# EAGLE board CT_schematic (EAGLE 7.6.0)

Size 100 x 80 mm. Coordinates in mm from the lower left corner, seen from the top.
Outline: 0,0 100,0 100,80 0,80 0,0
Copper layers (1*16): Top 0.035mm / dielectric 1.5mm / Bottom 0.035mm
Design rules "default": minimum track width 10mil, minimum drill 24mil, track to track 8mil, track to pad 8mil, pad to pad 8mil, via to via 8mil, smd to smd 8mil, copper to edge 40mil, drill to drill 8mil, minimum pad ring 10mil, minimum via ring 8mil, stop-mask expansion 4mil, vias tented up to drill 0mil, thermal gap 10mil

## Footprints (pad centres in the part's own frame; a part is rotated, then mirrored left to right if it is on the bottom)
C0603 = smd 0.8 x 0.8: 1 -0.762,0; 2 0.762,0
C0402 = smd 0.5 x 0.5: 1 -0.508,0; 2 0.508,0
C0805 = smd 1.2 x 1.3: 1 -1.016,0; 2 1.016,0
EXV-9H = smd 3.505 x 1.676: 1 -2.857,0; 2 2.857,0
L0603 = smd 0.8 x 0.8: 1 -0.762,0; 2 0.762,0
DR1040 = smd 1.6 x 3.2: 1 -4.458,0; 2 4.458,0
PJ-037B_PACKAGE = drill 3.7 square: 1 12,0 | drill 3.2 square: 2 6,0
R0603 = smd 0.8 x 0.8: 1 -0.762,0; 2 0.762,0
LQFP64 = smd 0.3 x 1.2: 1 -3.75,-5.75; 2 -3.25,-5.75; 3 -2.75,-5.75; 4 -2.25,-5.75; 5 -1.75,-5.75; 6 -1.25,-5.75; 7 -0.75,-5.75; 8 -0.25,-5.75; 9 0.25,-5.75; 10 0.75,-5.75; 11 1.25,-5.75; 12 1.75,-5.75; 13 2.25,-5.75; 14 2.75,-5.75; 15 3.25,-5.75; 16 3.75,-5.75; 33 3.75,5.75; 34 3.25,5.75; 35 2.75,5.75; 36 2.25,5.75; 37 1.75,5.75; 38 1.25,5.75; 39 0.75,5.75; 40 0.25,5.75; 41 -0.25,5.75; 42 -0.75,5.75; 43 -1.25,5.75; 44 -1.75,5.75; 45 -2.25,5.75; 46 -2.75,5.75; 47 -3.25,5.75; 48 -3.75,5.75 | smd 1.2 x 0.3: 17 5.75,-3.75; 18 5.75,-3.25; 19 5.75,-2.75; 20 5.75,-2.25; 21 5.75,-1.75; 22 5.75,-1.25; 23 5.75,-0.75; 24 5.75,-0.25; 25 5.75,0.25; 26 5.75,0.75; 27 5.75,1.25; 28 5.75,1.75; 29 5.75,2.25; 30 5.75,2.75; 31 5.75,3.25; 32 5.75,3.75; 49 -5.75,3.75; 50 -5.75,3.25; 51 -5.75,2.75; 52 -5.75,2.25; 53 -5.75,1.75; 54 -5.75,1.25; 55 -5.75,0.75; 56 -5.75,0.25; 57 -5.75,-0.25; 58 -5.75,-0.75; 59 -5.75,-1.25; 60 -5.75,-1.75; 61 -5.75,-2.25; 62 -5.75,-2.75; 63 -5.75,-3.25; 64 -5.75,-3.75
SAMTEC_FTSH-105-01-L-DV-K = smd 0.762 x 2.794: 1 -2.54,-2.032; 2 -2.54,2.032; 3 -1.27,-2.032; 4 -1.27,2.032; 5 0,-2.032; 6 0,2.032; 7 1.27,-2.032; 8 1.27,2.032; 9 2.54,-2.032; 10 2.54,2.032
AT24C02D = smd 1.6 x 0.6: 1 -2.475,1.905 | smd 1.55 x 0.6: 2 -2.475,0.635; 3 -2.475,-0.635; 4 -2.475,-1.905; 5 2.475,-1.905; 6 2.475,-0.635; 7 2.475,0.635; 8 2.475,1.905
SSOP-28 = smd 1.5 x 0.4: 1 -3.625,4.225; 2 -3.625,3.575; 3 -3.625,2.925; 4 -3.625,2.275; 5 -3.625,1.625; 6 -3.625,0.975; 7 -3.625,0.325; 8 -3.625,-0.325; 9 -3.625,-0.975; 10 -3.625,-1.625; 11 -3.625,-2.275; 12 -3.625,-2.925; 13 -3.625,-3.575; 14 -3.625,-4.225; 15 3.625,-4.225; 16 3.625,-3.575; 17 3.625,-2.925; 18 3.625,-2.275; 19 3.625,-1.625; 20 3.625,-0.975; 21 3.625,-0.325; 22 3.625,0.325; 23 3.625,0.975; 24 3.625,1.625; 25 3.625,2.275; 26 3.625,2.925; 27 3.625,3.575; 28 3.625,4.225
HTSS-105-01-G-D = drill 1 pad 1.8 square: 1 0,0 | drill 1 pad 1.8: 2 0,2.54; 3 2.54,0; 4 2.54,2.54; 5 5.08,0; 6 5.08,2.54; 7 7.62,0; 8 7.62,2.54; 9 10.16,0; 10 10.16,2.54
USB-A-H = drill 0.914: 1 2.718,3.493; 2 2.718,1.003; 3 2.718,-1.003; 4 2.718,-3.493 | drill 2.311: 5 0,-6.566; 6 0,6.566
SOT143B = smd 1 x 0.7: 1 -0.75,-1 | smd 0.6 x 0.7: 2 0.95,-1; 3 0.95,1; 4 -0.95,1
ABS07-32.768KHZ-7-T = smd 1.1 x 2.4: 1 -2.5,0; 2 0,0
ASFL1 = smd 1.7 x 1.5: 1 -1.27,-1.1; 2 1.27,-1.1; 3 1.27,1.1; 4 -1.27,1.1
TSOT-23-5 = smd 1.3 x 0.62: 1 -1.31,0.95; 2 -1.31,0; 3 -1.31,-0.95; 4 1.31,-0.95; 5 1.31,0.95
SON-6 = smd 0.55 x 0.3: 1 -0.355,0.5 | smd 0.52 x 0.3: 2 -0.37,0; 3 -0.37,-0.5; 4 0.37,-0.5; 5 0.37,0; 6 0.37,0.5
SW_4-1437565-2 = smd 1.4 x 2.1: 1 -2.23,4.55; 2 -2.23,-4.55; 3 2.23,4.55; 4 2.23,-4.55
LGM67K-G1J2-24-Z = smd 0.8 x 1.4: A -2,0; C 0,0
NC7SZ125M5X = smd 1.3 x 0.7: 1 -1.3,0.95; 2 -1.3,0; 3 -1.3,-0.95; 4 1.3,-0.95; 5 1.3,0.95

## Placement (x,y rotation side)
C1  1e-06  [C0603]  -58.42,67.31 0 top  (outside the outline)
C2  1e-07  [C0603]  -62.23,67.31 0 top  (outside the outline)
C3  1e-07  [C0603]  -66.04,67.31 0 top  (outside the outline)
C4  1e-07  [C0603]  -69.85,67.31 0 top  (outside the outline)
C5  1e-07  [C0603]  -73.66,67.31 0 top  (outside the outline)
C6  1e-07  [C0603]  -15.24,72.39 0 top  (outside the outline)
C7  4.7e-06  [C0603]  -54.61,67.31 0 top  (outside the outline)
C8  1e-08  [C0603]  -19.05,72.39 0 top  (outside the outline)
C9  1e-06  [C0603]  -22.86,72.39 0 top  (outside the outline)
C10  1e-11  [C0402]  -60.96,72.39 0 top  (outside the outline)
C11  1e-11  [C0402]  -64.77,72.39 0 top  (outside the outline)
C12  1e-07  [C0402]  -68.58,72.39 0 top  (outside the outline)
C13  1e-08  [C0402]  -72.39,72.39 0 top  (outside the outline)
C14  1e-08  [C0402]  -15.24,77.47 0 top  (outside the outline)
C15  1e-07  [C0402]  -19.05,77.47 0 top  (outside the outline)
C16  1e-07  [C0402]  -22.86,77.47 0 top  (outside the outline)
C17  1e-07  [C0402]  -26.67,77.47 0 top  (outside the outline)
C18  1e-07  [C0402]  -30.48,77.47 0 top  (outside the outline)
C19  1e-07  [C0402]  -34.29,77.47 0 top  (outside the outline)
C20  1e-08  [C0402]  -38.1,77.47 0 top  (outside the outline)
C21  1e-05  [C0805]  -60.96,54.61 0 top  (outside the outline)
C22  1e-05  [C0805]  -66.04,54.61 0 top  (outside the outline)
C23  1e-07  [C0402]  -41.91,77.47 0 top  (outside the outline)
C24  0.0001  [EXV-9H]  -52.07,46.99 0 top  (outside the outline)
C25  0.0001  [EXV-9H]  -63.5,46.99 0 top  (outside the outline)
C26  1e-08  [C0402]  -45.72,77.47 0 top  (outside the outline)
C27  1e-08  [C0402]  -49.53,77.47 0 top  (outside the outline)
F1  240.0  [L0603]  -26.67,72.39 0 top  (outside the outline)
I1  5.2e-06  [DR1040]  -19.05,36.83 0 top  (outside the outline)
J1  PJ-037B  [PJ-037B_PACKAGE]  -27.94,24.13 0 top  (outside the outline)
R2  1000.0  [R0603]  -30.48,72.39 0 top  (outside the outline)
R4  4700.0  [R0603]  -34.29,72.39 0 top  (outside the outline)
R5  2200.0  [R0603]  -38.1,72.39 0 top  (outside the outline)
R6  2200.0  [R0603]  -41.91,72.39 0 top  (outside the outline)
R7  2200.0  [R0603]  -45.72,72.39 0 top  (outside the outline)
R8  2200.0  [R0603]  -49.53,72.39 0 top  (outside the outline)
R9  10000.0  [R0603]  -41.91,62.23 0 top  (outside the outline)
R10  10000.0  [R0603]  -46.99,62.23 0 top  (outside the outline)
R11  10000.0  [R0603]  -52.07,62.23 0 top  (outside the outline)
R12  10000.0  [R0603]  -57.15,62.23 0 top  (outside the outline)
R13  10000.0  [R0603]  -62.23,62.23 0 top  (outside the outline)
R14  5.0  [R0603]  -53.34,72.39 0 top  (outside the outline)
R15  10000.0  [R0603]  -67.31,62.23 0 top  (outside the outline)
R16  10000.0  [R0603]  -72.39,62.23 0 top  (outside the outline)
R17  10000.0  [R0603]  -15.24,67.31 0 top  (outside the outline)
R18  10000.0  [R0603]  -20.32,67.31 0 top  (outside the outline)
R19  10000.0  [R0603]  -25.4,67.31 0 top  (outside the outline)
R20  10000.0  [R0603]  -30.48,67.31 0 top  (outside the outline)
R21  10000.0  [R0603]  -35.56,67.31 0 top  (outside the outline)
R22  10000.0  [R0603]  -40.64,67.31 0 top  (outside the outline)
R23  100000.0  [R0603]  -21.59,62.23 0 top  (outside the outline)
R24  220000.0  [R0603]  -26.67,62.23 0 top  (outside the outline)
R25  1000000.0  [R0603]  -16.51,62.23 0 top  (outside the outline)
R26  10000.0  [R0603]  -45.72,67.31 0 top  (outside the outline)
R27  10000.0  [R0603]  -50.8,67.31 0 top  (outside the outline)
R28  9100.0  [R0603]  -57.15,72.39 0 top  (outside the outline)
R29  680000.0  [R0603]  -31.75,62.23 0 top  (outside the outline)
R30  120000.0  [R0603]  -36.83,62.23 0 top  (outside the outline)
U1  STM32F303RBT6  [LQFP64]  -40.64,24.13 0 top  (outside the outline)
U2  FTSH-105-01-L-DV-K  [SAMTEC_FTSH-105-01-L-DV-K]  -64.77,7.62 0 top  (outside the outline)
U3  AT24C02D-SSHM-T  [AT24C02D]  -55.88,35.56 0 top  (outside the outline)
U4  AT24C02D-SSHM-T  [AT24C02D]  -25.4,46.99 0 top  (outside the outline)
U5  ST3241EBPR  [SSOP-28]  -35.56,7.62 0 top  (outside the outline)
U6  HTSS-105-01-G-D  [HTSS-105-01-G-D]  -39.37,35.56 0 top  (outside the outline)
U7  61400416021  [USB-A-H]  -19.05,8.89 0 top  (outside the outline)
U8  prtr5v0u2ax  [SOT143B]  -62.23,77.47 0 top  (outside the outline)
U9  ABS07-32.768KHZ-7-T  [ABS07-32.768KHZ-7-T]  -27.94,55.88 0 top  (outside the outline)
U10  ASFL1-25MHZ-NCS  [ASFL1]  -43.18,46.99 0 top  (outside the outline)
U11  ltc3406es5  [TSOT-23-5]  -71.12,53.34 0 top  (outside the outline)
U12  TPS3895ADRYR  [SON-6]  -66.04,76.2 0 top  (outside the outline)
U13  4-1437565-2  [SW_4-1437565-2]  -62.23,24.13 0 top  (outside the outline)
U14  Q65110A2395  [LGM67K-G1J2-24-Z]  -36.83,54.61 0 top  (outside the outline)
U15  nc7sz125m5x  [NC7SZ125M5X]  -48.26,53.34 0 top  (outside the outline)
U16  nc7sz125m5x  [NC7SZ125M5X]  -54.61,53.34 0 top  (outside the outline)

## Library data of the parts
C1-C27 F1 I1 J1 R2 R4-R30 U1-U16 = circuit_tree

## Nets
CLK_CRYSTAL_U1_3: C10.1 U1.3 U9.1
CLK_CRYSTAL_U1_4: C11.1 U1.4 U9.2
CLK_U1_5: U1.5 U10.3
GND: C1.2 C2.2 C3.2 C4.2 C5.2 C6.2 C7.2 C8.2 C9.2 C10.2 C11.2 C12.2 C13.2 C14.2 C15.2 C18.2 C19.2 C20.2 C21.2 C22.1 C22.2 C23.2 C24.2 C25.2 C26.2 C27.2 J1.2 R2.2 R9.2 R13.2 R14.2 R15.2 R17.2 R18.2 R19.2 R21.2 R22.2 R24.2 R28.2 R30.2 U1.12 U1.31 U1.47 U1.63 U2.3 U2.5 U3.4 U4.4 U5.23 U5.25 U6.9 U7.4 U7.5 U7.6 U8.1 U10.2 U11.2 U12.2 U14.C U15.2 U15.3 U16.1 U16.3
NET_U1_6: R7.1 U1.6 U4.6
NET_U1_7: R4.1 U1.7 U16.4
NET_U1_13: C8.1 C9.1 F1.1 U1.13
NET_U1_43: R8.1 U1.43 U4.5
NET_U1_58: R5.1 U1.58 U3.6
NET_U1_59: R6.1 U1.59 U3.5
NET_U1_60: R9.1 U1.60
NET_U1_61: U14.A
NET_U1_62: U13.3 U13.4
NET_U2_9: R14.1 U2.9
NET_U3_1: R16.1 U3.1
NET_U3_2: R17.1 U3.2
NET_U3_3: R18.1 U3.3
NET_U3_7: R15.1 U3.7
NET_U4_1: R20.1 U4.1
NET_U4_2: R21.1 U4.2
NET_U4_3: R22.1 U4.3
NET_U4_7: R19.1 U4.7
NET_U5_1: C17.1 U5.1
NET_U5_2: C17.2 U5.2
NET_U5_3: C19.1 U5.3
NET_U5_22: R23.1 U5.22
NET_U5_24: C16.2 U5.24
NET_U5_27: C18.1 U5.27
NET_U5_28: C16.1 U5.28
NET_U6_3: U5.4 U6.3
NET_U6_4: U5.5 U6.4
NET_U6_5: U5.9 U6.5
NET_U6_6: U5.10 U6.6
NET_U8_4: U7.1 U8.4
NET_U11_1: U11.1
NET_U11_3: I1.1 U11.3
NET_U11_5: R24.1 R25.1 U11.5
NET_U11_ATNET_3: I1.2 R25.2
NET_U12_1: R27.1 R28.1 U12.1
NET_U12_3: R29.2 R30.1 U12.3
NET_U12_4: R26.1 U12.4 U15.4 U16.2
NET_U13_1: R2.1 U13.1 U13.2
PROC_SYS_JTCK_SWCLK: R13.1 U1.49 U2.4
PROC_SYS_JTDI: R11.1 U1.50 U2.8
PROC_SYS_JTDO_TRACESWO: U1.55 U2.6
PROC_SYS_JTMS_SWDIO: R12.1 U1.46 U2.2
PROC_UART4_RX: U1.52 U5.19
PROC_UART4_TX: U1.51 U5.14
PROC_USB_DM: U7.2 U8.3
PROC_USB_DP: U7.3 U8.2
RST_OUT_U2_JTAG_RST_B: R10.1 U2.10 U15.1
VCC_S1_5V2: C21.1 C24.1 C25.1 J1.1 U11.4
VCC_TIER1_3V3: C1.1 C2.1 C3.1 C4.1 C5.1 C6.1 C7.1 C12.1 C13.1 C14.1 C15.1 C20.1 C22.2 C23.1 C26.1 C27.1 F1.2 I1.2 R4.2 R5.2 R6.2 R7.2 R8.2 R10.2 R11.2 R12.2 R16.2 R20.2 R23.2 R25.2 R26.2 R27.2 R29.1 U1.1 U1.19 U1.32 U1.48 U1.64 U2.1 U3.8 U4.8 U5.26 U10.4 U12.6 U15.5 U16.5

## Tracks (layer width: path | path; a pad name or v marks a point on that pad's centre or on a via)
CLK_CRYSTAL_U1_3  (2 unrouted)
CLK_CRYSTAL_U1_4  (2 unrouted)
CLK_U1_5  (1 unrouted)
GND  (62 unrouted)
NET_U1_6  (2 unrouted)
NET_U1_7  (2 unrouted)
NET_U1_13  (3 unrouted)
NET_U1_43  (2 unrouted)
NET_U1_58  (2 unrouted)
NET_U1_59  (2 unrouted)
NET_U1_60  (1 unrouted)
NET_U1_62  (1 unrouted)
NET_U2_9  (1 unrouted)
NET_U3_1  (1 unrouted)
NET_U3_2  (1 unrouted)
NET_U3_3  (1 unrouted)
NET_U3_7  (1 unrouted)
NET_U4_1  (1 unrouted)
NET_U4_2  (1 unrouted)
NET_U4_3  (1 unrouted)
NET_U4_7  (1 unrouted)
NET_U5_1  (1 unrouted)
NET_U5_2  (1 unrouted)
NET_U5_3  (1 unrouted)
NET_U5_22  (1 unrouted)
NET_U5_24  (1 unrouted)
NET_U5_27  (1 unrouted)
NET_U5_28  (1 unrouted)
NET_U6_3  (1 unrouted)
NET_U6_4  (1 unrouted)
NET_U6_5  (1 unrouted)
NET_U6_6  (1 unrouted)
NET_U8_4  (1 unrouted)
NET_U11_3  (1 unrouted)
NET_U11_5  (2 unrouted)
NET_U11_ATNET_3  (1 unrouted)
NET_U12_1  (2 unrouted)
NET_U12_3  (2 unrouted)
NET_U12_4  (3 unrouted)
NET_U13_1  (2 unrouted)
PROC_SYS_JTCK_SWCLK  (2 unrouted)
PROC_SYS_JTDI  (2 unrouted)
PROC_SYS_JTDO_TRACESWO  (1 unrouted)
PROC_SYS_JTMS_SWDIO  (2 unrouted)
PROC_UART4_RX  (1 unrouted)
PROC_UART4_TX  (1 unrouted)
PROC_USB_DM  (1 unrouted)
PROC_USB_DP  (1 unrouted)
RST_OUT_U2_JTAG_RST_B  (2 unrouted)
VCC_S1_5V2  (4 unrouted)
VCC_TIER1_3V3  (45 unrouted)